# Altium PCB Hierarchical Example PCB.PcbDoc
Units mil, origin at the board's own origin, x right, y up, seen from the top; angles counter-clockwise.
Board outline 6000 x 4000 mil, 2 copper layers (Top Layer, Bottom Layer); 10 components, 20 nets, 40 pads, 0 vias.
Unrouted connection lines stored in the file: 20.
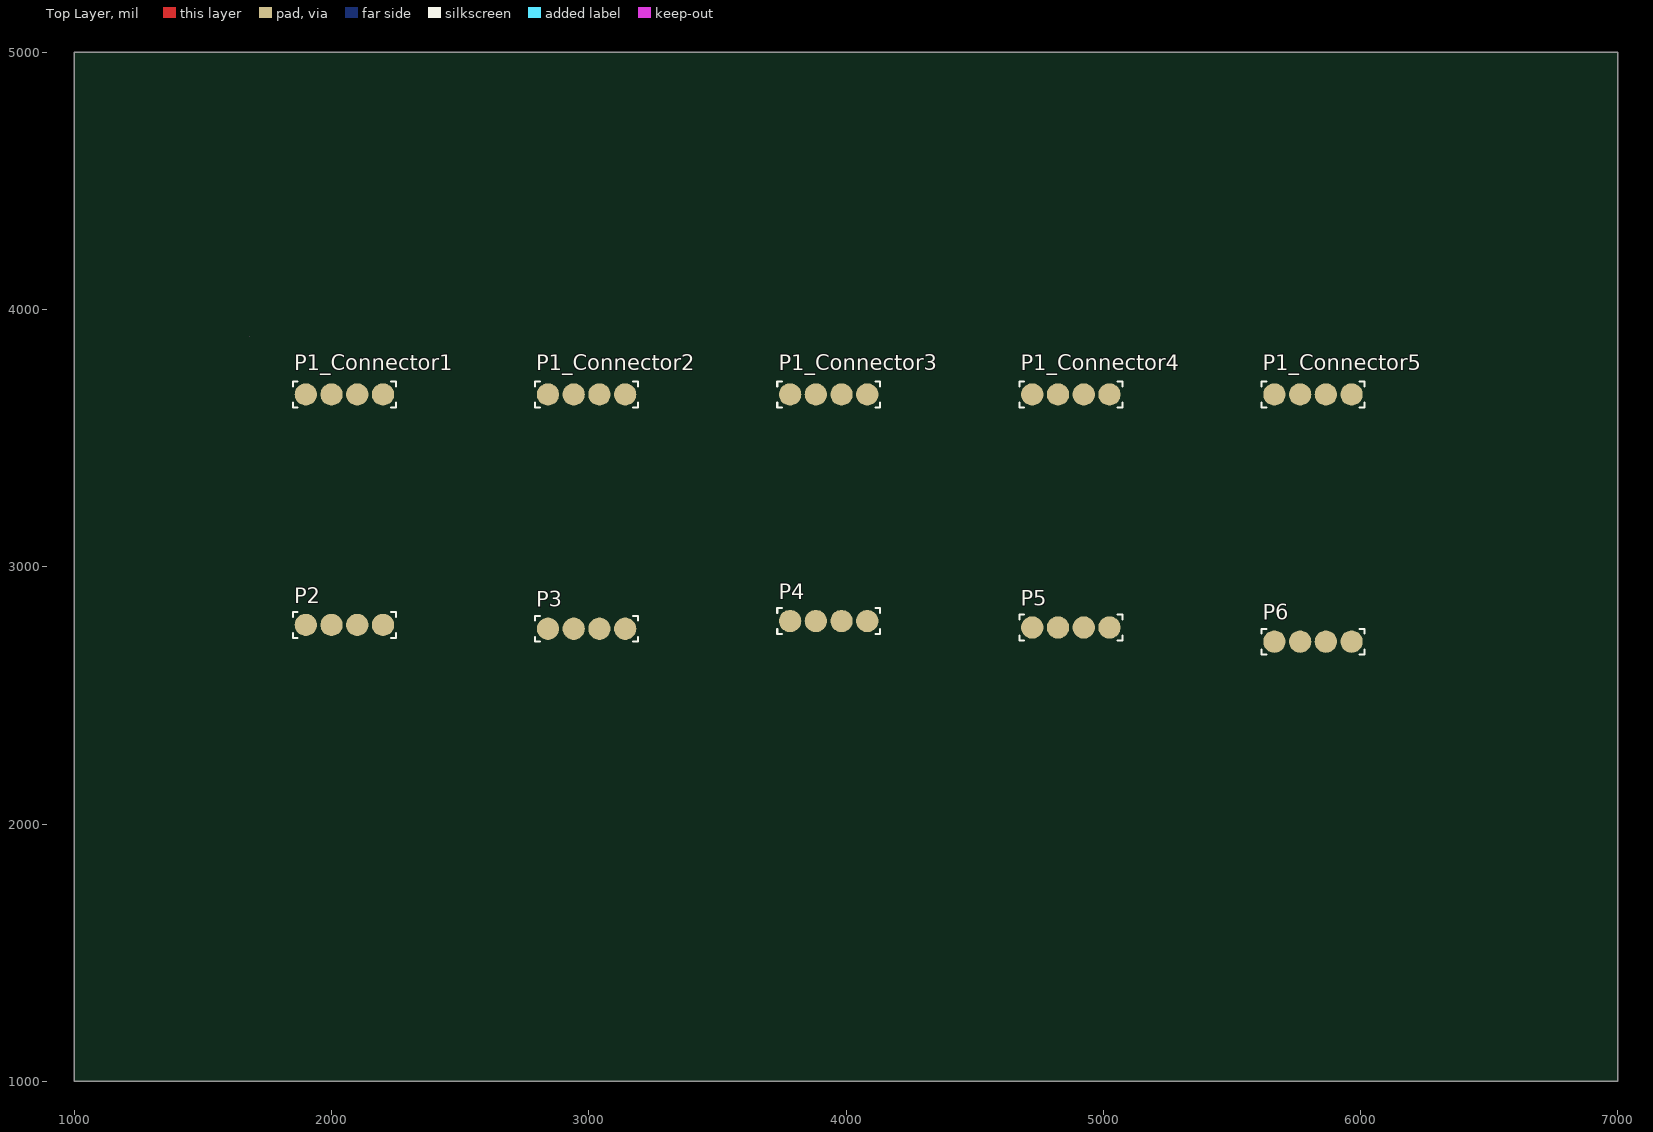
[diagram p0: Top Layer view]
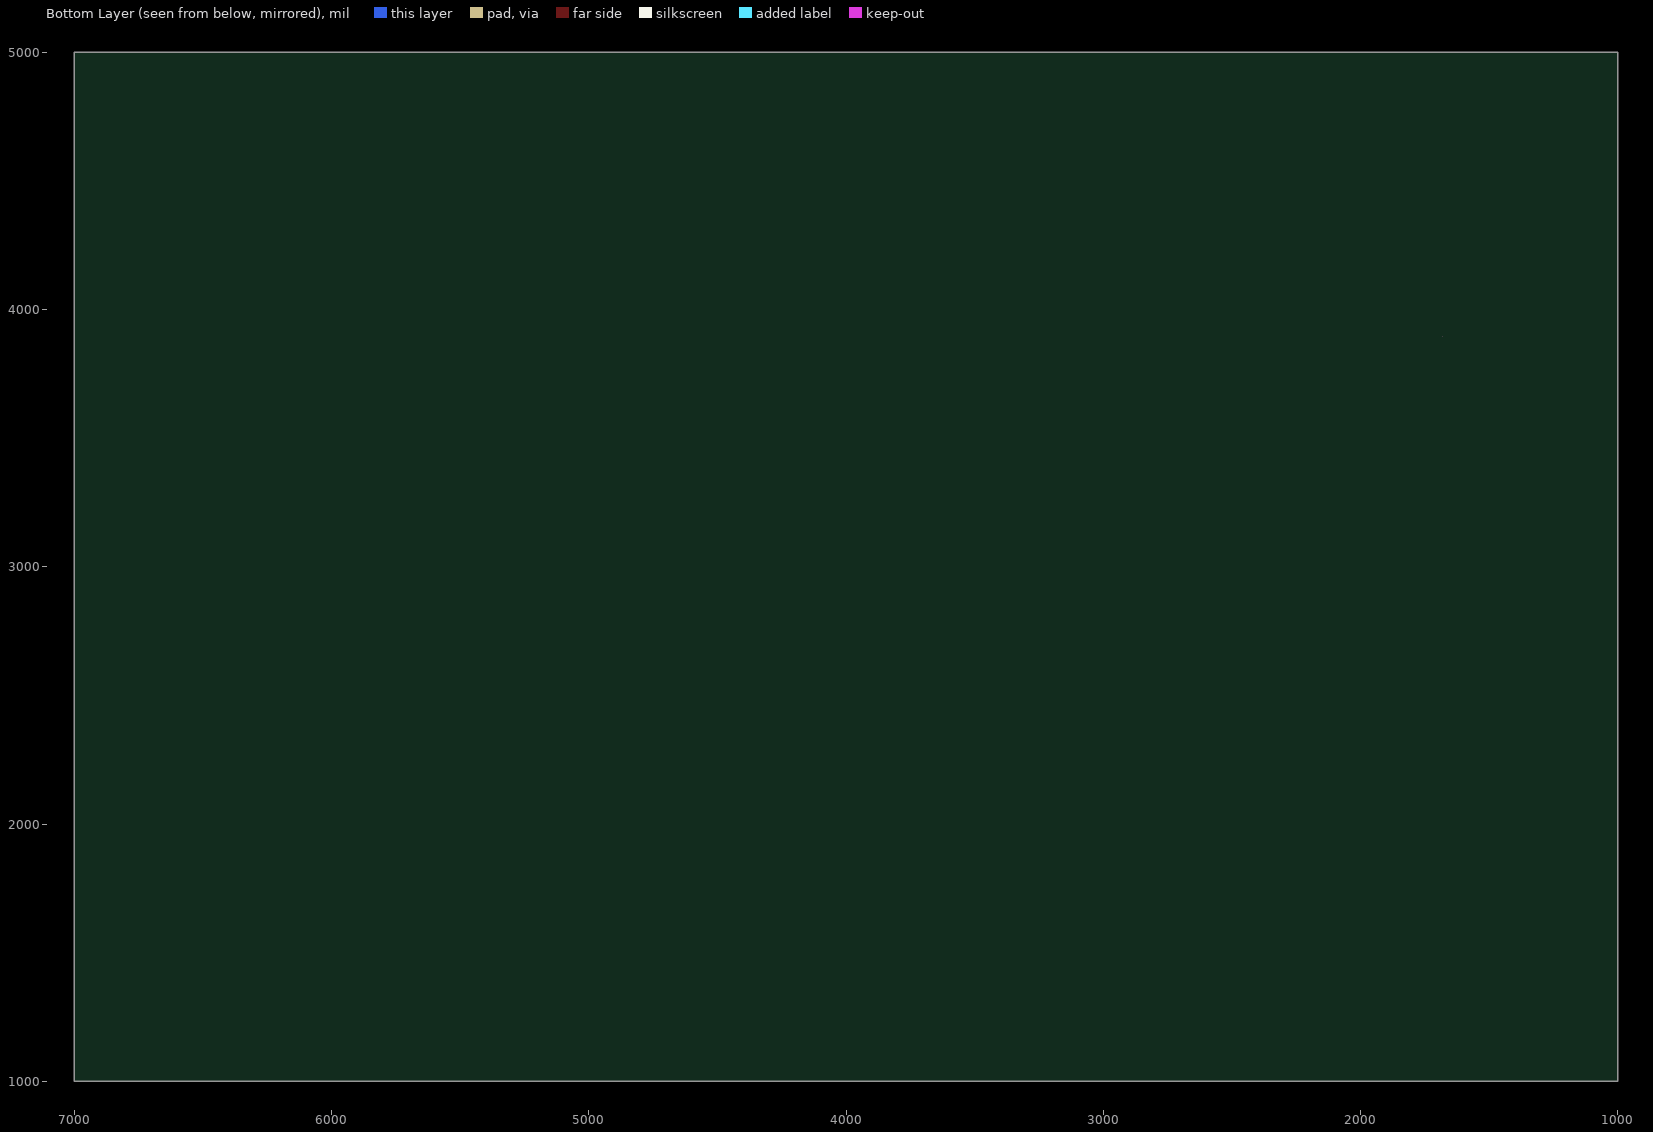
[diagram p1: Bottom Layer view, seen from below]

## Layer stack, top to bottom
Top Solder: solder mask 0.4, Solder Resist, Dk 3.5
Top Layer: signal copper 1.4
Dielectric 1: dielectric 12.6, FR-4, Dk 4.8
Bottom Layer: signal copper 1.4
Bottom Solder: solder mask 0.4, Solder Resist, Dk 3.5

## Board outline
1000,1000 7000,1000 7000,5000 1000,5000
cut-out: 1680,3895

## Design rules (kind name [scope] priority, off if disabled: settings)
Clearance [All] p1: gap=10 ignorepadtopadclearanceinfootprint=FALSE except(0: Arc-Hole Track-Hole SMDPad-Hole THPad-Hole Via-Hole Fill-Hole Poly-Hole Region-Hole Text-Hole)
DiffPairsRouting [All] p1: maxlimit=10 minlimit=10 mostfreqgap=10 toplayer_minwidth=15 toplayer_maxwidth=15 toplayer_prefwidth=15 bottomlayer_minwidth=15 bottomlayer_maxwidth=15 bottomlayer_prefwidth=15 maxuncoupledlength=500
PolygonConnect [All] p1: connectstyle=Relief reliefconductorwidth=10 reliefentries=4 polygonreliefangle="90 Angle" airgapwidth=10
RoomDefinition "Top Level" [InComponentClass('Top Level')] p1: confinementstyle=ConfineIn formatcopy=TRUE lockcomponents=FALSE outline 1830.47,2643.94 6030.47,2643.94 6030.47,2853.94 1830.47,2853.94
RoomDefinition Connector5 [InComponentClass('Connector5')] p2: confinementstyle=ConfineIn formatcopy=TRUE lockcomponents=FALSE outline 5600.55,3605 5600.55,3734.84 6030.39,3734.84 6030.39,3605
RoomDefinition Connector4 [InComponentClass('Connector4')] p3: confinementstyle=ConfineIn formatcopy=TRUE lockcomponents=FALSE outline 4659.2,3605 4659.2,3734.84 5089.04,3734.84 5089.04,3605
RoomDefinition Connector3 [InComponentClass('Connector3')] p4: confinementstyle=ConfineIn formatcopy=TRUE lockcomponents=FALSE outline 3717.85,3605 3717.85,3734.84 4147.69,3734.84 4147.69,3605
RoomDefinition Connector2 [InComponentClass('Connector2')] p5: confinementstyle=ConfineIn formatcopy=TRUE lockcomponents=FALSE outline 2776.5,3605 2776.5,3734.84 3206.35,3734.84 3206.35,3605
RoomDefinition Connector1 [InComponentClass('Connector1')] p6: confinementstyle=ConfineIn formatcopy=TRUE lockcomponents=FALSE outline 1835.16,3605 1835.16,3734.84 2265,3734.84 2265,3605
RoutingVias [All] p1: holewidth=28 width=50 viastyle="Through Hole" minholewidth=28 minwidth=50 maxholewidth=28 maxwidth=50
SolderMaskExpansion [All] p1: expansion=4
Width [All] p1: maxlimit=10 minlimit=10 preferedwidth=10
29 further rules are at their usual default settings.

## Classes and differential pairs
channel class Connector: Connector1 Connector2 Connector3 Connector4 Connector5
component class "Top Level": P2 P3 P4 P5 P6
component class Connector5: P1_Connector5
component class Connector4: P1_Connector4
component class Connector3: P1_Connector3
component class Connector2: P1_Connector2
component class Connector1: P1_Connector1
differential pair Connector5.Output: +Connector5.Output_P -Connector5.Output_N
differential pair Connector5.Input: +Connector5.Input_P -Connector5.Input_N
differential pair Connector4.Output: +Connector4.Output_P -Connector4.Output_N
differential pair Connector4.Input: +Connector4.Input_P -Connector4.Input_N
differential pair Connector3.Output: +Connector3.Output_P -Connector3.Output_N
differential pair Connector3.Input: +Connector3.Input_P -Connector3.Input_N
differential pair Connector2.Output: +Connector2.Output_P -Connector2.Output_N
differential pair Connector2.Input: +Connector2.Input_P -Connector2.Input_N
differential pair Connector1.Output: +Connector1.Output_P -Connector1.Output_N
differential pair Connector1.Input: +Connector1.Input_P -Connector1.Input_N

## Components (designator, comment, footprint, x,y, rotation, side; value= is the part's Value field where it differs from the comment)
P1_Connector1 "811-22-004-30-000191" MILL-MAX_811-22-004-30-0001910 2050.08,3669.92 r180 top (schematic designator P1)
P1_Connector2 "811-22-004-30-000191" MILL-MAX_811-22-004-30-0001910 2991.43,3669.92 r180 top (schematic designator P1)
P1_Connector3 "811-22-004-30-000191" MILL-MAX_811-22-004-30-0001910 3932.77,3669.92 r180 top (schematic designator P1)
P1_Connector4 "811-22-004-30-000191" MILL-MAX_811-22-004-30-0001910 4874.12,3669.92 r180 top (schematic designator P1)
P1_Connector5 "811-22-004-30-000191" MILL-MAX_811-22-004-30-0001910 5815.47,3669.92 r180 top (schematic designator P1)
P2 "811-22-004-30-000191" MILL-MAX_811-22-004-30-0001910 2050.08,2773.94 r180 top
P3 "811-22-004-30-000191" MILL-MAX_811-22-004-30-0001910 2991.43,2758.94 r180 top
P4 "811-22-004-30-000191" MILL-MAX_811-22-004-30-0001910 3932.77,2788.94 r180 top
P5 "811-22-004-30-000191" MILL-MAX_811-22-004-30-0001910 4874.12,2763.94 r180 top
P6 "811-22-004-30-000191" MILL-MAX_811-22-004-30-0001910 5815.47,2708.94 r180 top

## Footprints (in the part's own frame and the unit in brackets; to place one, negate y for a bottom-side part, rotate by r counter-clockwise, add the part's x,y. Pads: shape width x height; smd on the part's side, far side on the other; paste and mask are expansions set on the pad)
MILL-MAX_811-22-004-30-0001910 [mm] "Header, 4-Leads, Body 10.16x2.54mm, Pitch 2.54mm"
  round 2.2 smd: 1(-3.81,0) 2(-1.27,0) 3(1.27,0) 4(3.81,0)
  silkscreen extent -5.08,-1.27 5.08,1.27, body extent -5.08,-1.27 5.08,1.27, height 3.48

## Part data
P1_Connector1 P1_Connector2 P1_Connector3 P1_Connector4 P1_Connector5 P2 P3 P4 P5 P6: library part CMP-1650-00001-1, "Spring-Loaded Connector, 2.54 Grid Surface Mount, Low Profile Single Row Strip, Vertical, 4-Pin Header, RoHS, Tape and Reel", Current Rating="2000 mA", ComponentLink1Description="Manufacturer URL", ComponentLink1URL=http://www.mill-max.com/, ComponentLink2Description=Datasheet, ComponentLink2URL=http://www.mill-max.com/products/datasheet/sockets/811-22-004-30-000191, ComponentLink3Description="Package Specification", ComponentLink3URL=http://www.mill-max.com/assets/pdfs/metric/007M.PDF, Gender=Male, Mounting Technology="Surface Mount", No. of Positions=4, No. of Rows=1, Orientation=Vertical, PackageDescription="4-Pin Header, Body 10.16 x 2.54 mm, Pitch 2.54 mm", Packing="Tape and Reel", Part Number=811-22-004-30-000191, PartNumber=811-22-004-30-000191, Pitch="2.54 mm", RoHS=TRUE

## Nets (pads, with @x,y where several pads share a name; then routed paths per layer and width w, separated by ;. In a path a pad name is that pad's centre, name@x,y a point inside that pad or via, vN(x,y) a via of type N, cw(c..) or ccw(c..) an arc to the next point about the centre after c; other vN are vias at no path point)
Connector1.Input_N: P1_Connector1.2 P2.2
Connector1.Input_P: P1_Connector1.1 P2.1
Connector1.Output_N: P1_Connector1.4 P2.4
Connector1.Output_P: P1_Connector1.3 P2.3
Connector2.Input_N: P1_Connector2.2 P3.2
Connector2.Input_P: P1_Connector2.1 P3.1
Connector2.Output_N: P1_Connector2.4 P3.4
Connector2.Output_P: P1_Connector2.3 P3.3
Connector3.Input_N: P1_Connector3.2 P4.2
Connector3.Input_P: P1_Connector3.1 P4.1
Connector3.Output_N: P1_Connector3.4 P4.4
Connector3.Output_P: P1_Connector3.3 P4.3
Connector4.Input_N: P1_Connector4.2 P5.2
Connector4.Input_P: P1_Connector4.1 P5.1
Connector4.Output_N: P1_Connector4.4 P5.4
Connector4.Output_P: P1_Connector4.3 P5.3
Connector5.Input_N: P1_Connector5.2 P6.2
Connector5.Input_P: P1_Connector5.1 P6.1
Connector5.Output_N: P1_Connector5.4 P6.4
Connector5.Output_P: P1_Connector5.3 P6.3